# Altium PCB 10P50MIL-Debugger-Adapter-Board.PcbDoc
Units mm, origin at the board's own origin, x right, y up, seen from the top; angles counter-clockwise.
Board outline 36 x 36 mm, 2 copper layers (Top Layer, Bottom Layer), stack 1.621 mm thick; 6 components, 10 nets, 50 pads, 4 vias.
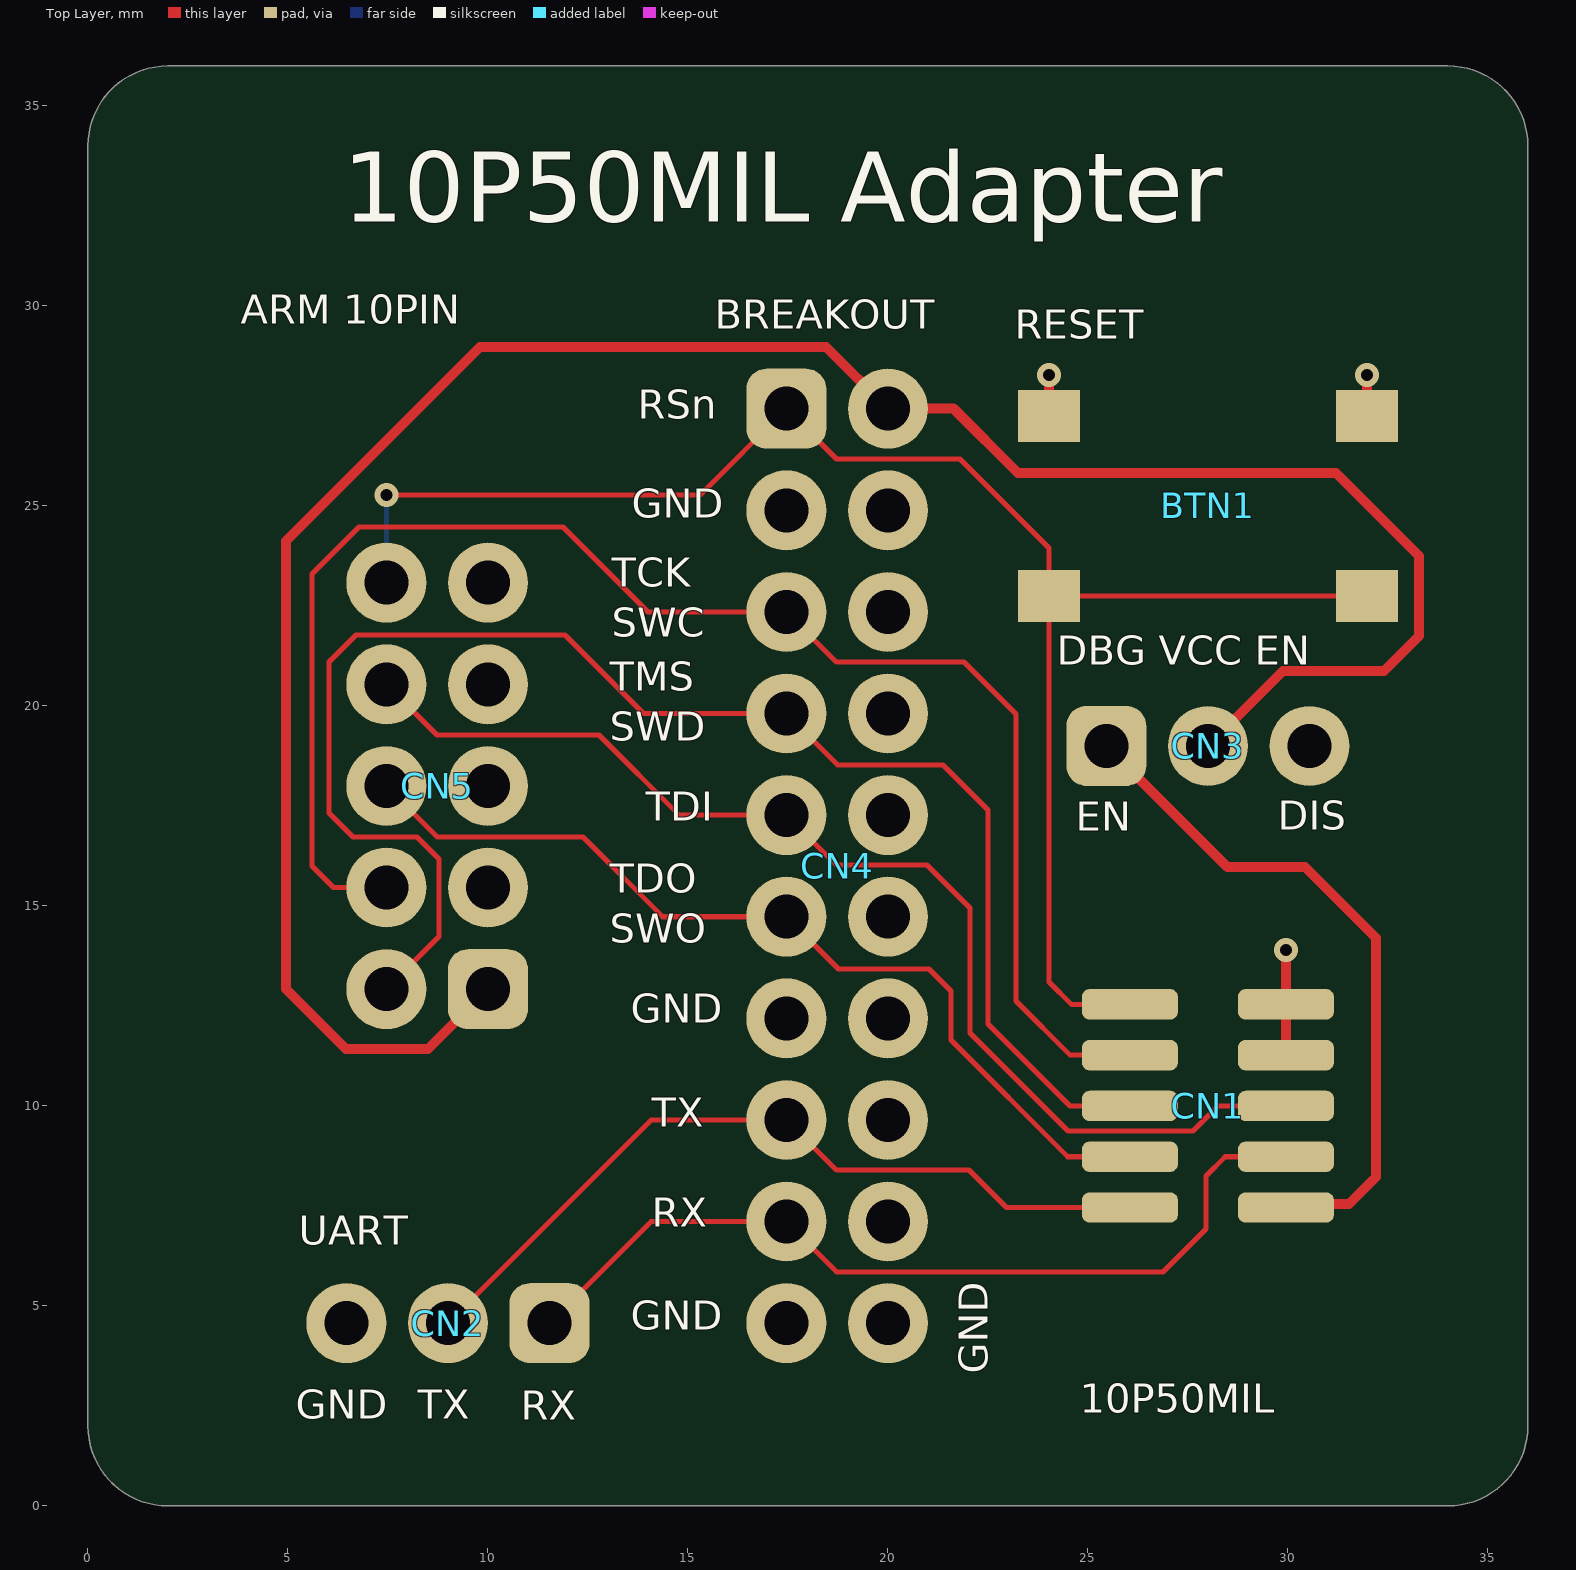
[diagram p0: Top Layer view]
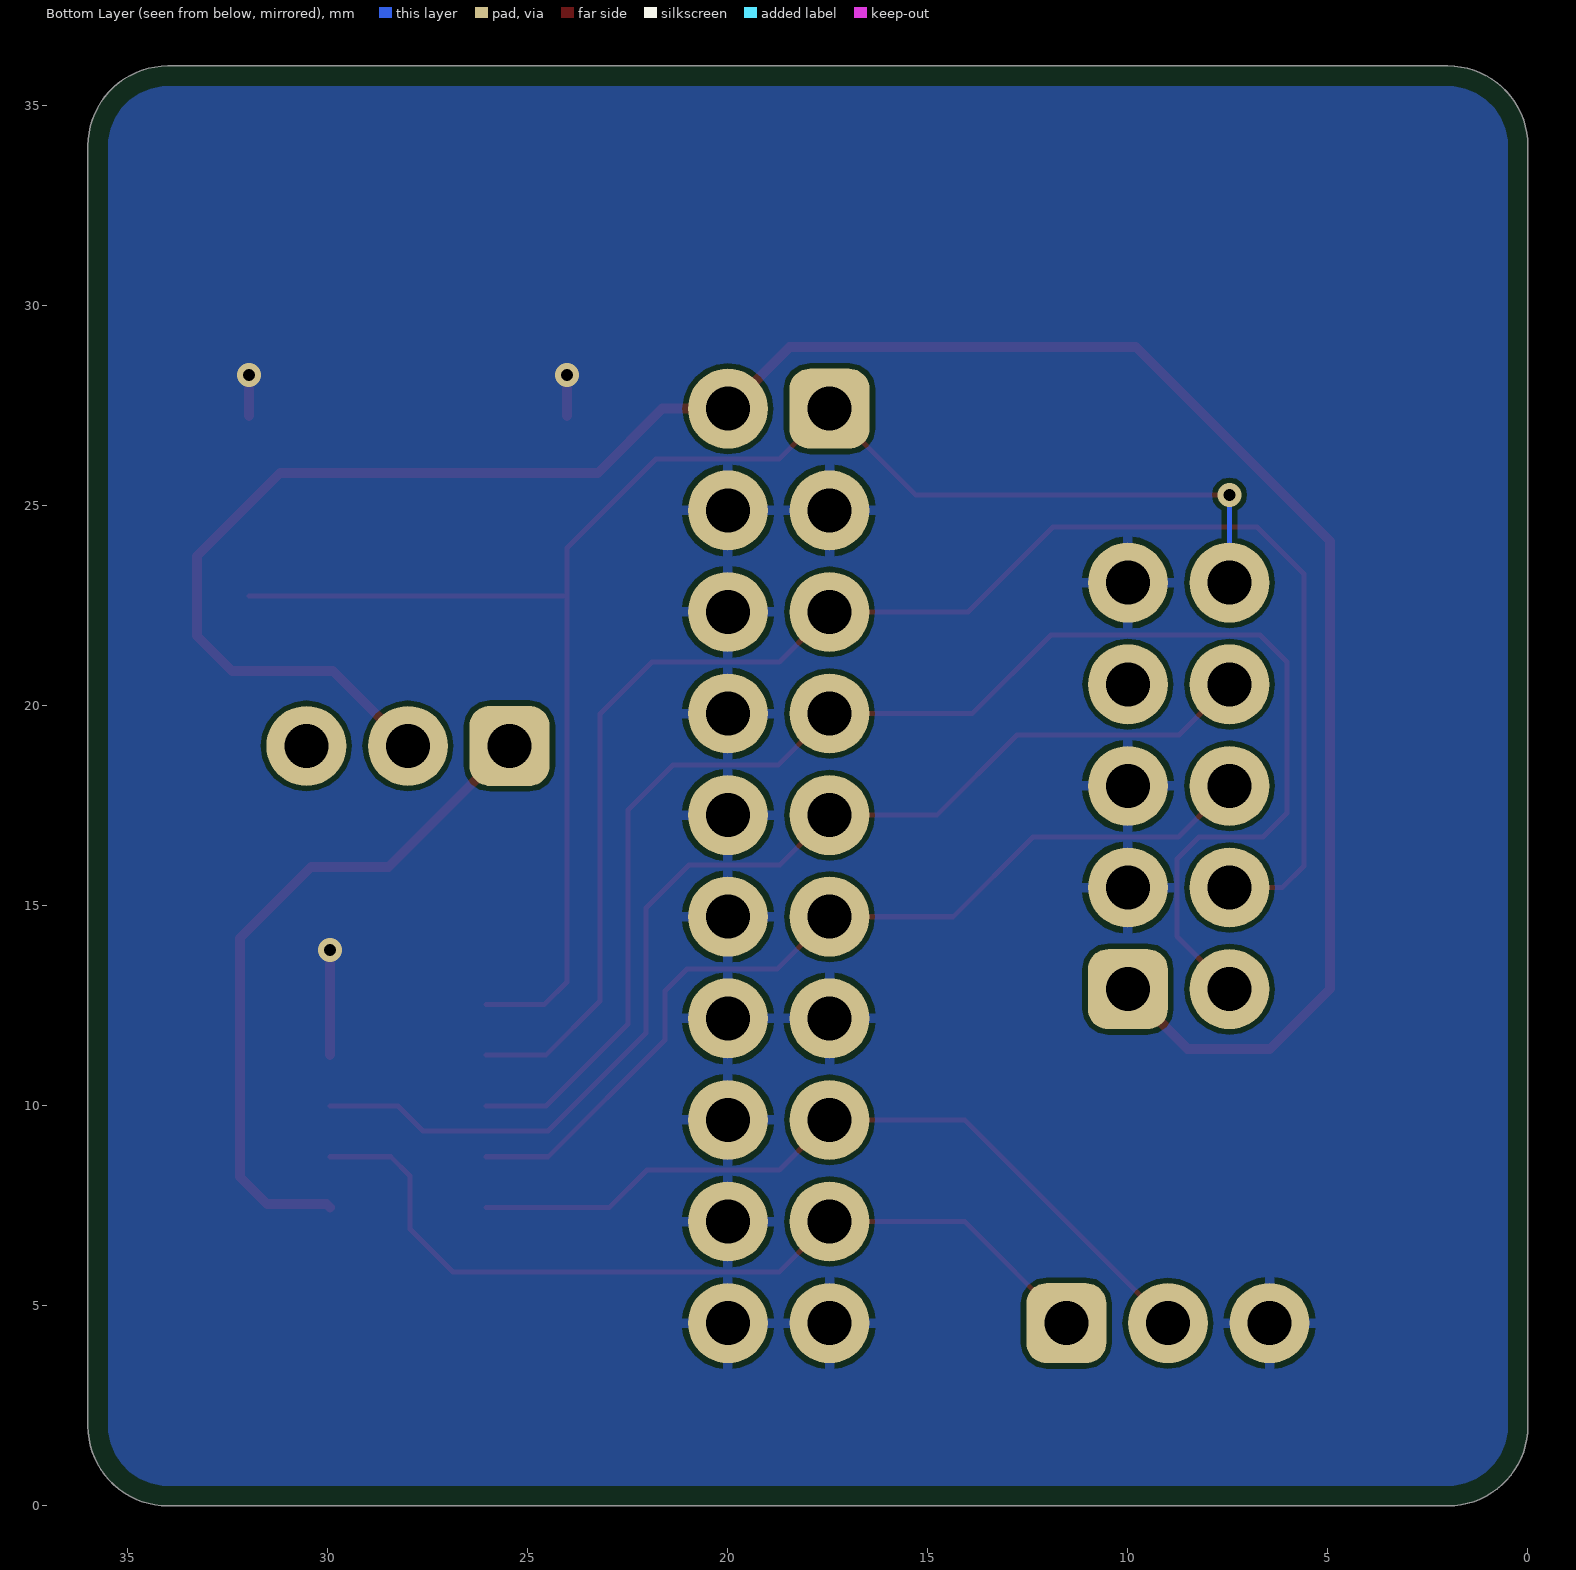
[diagram p1: Bottom Layer view, seen from below]
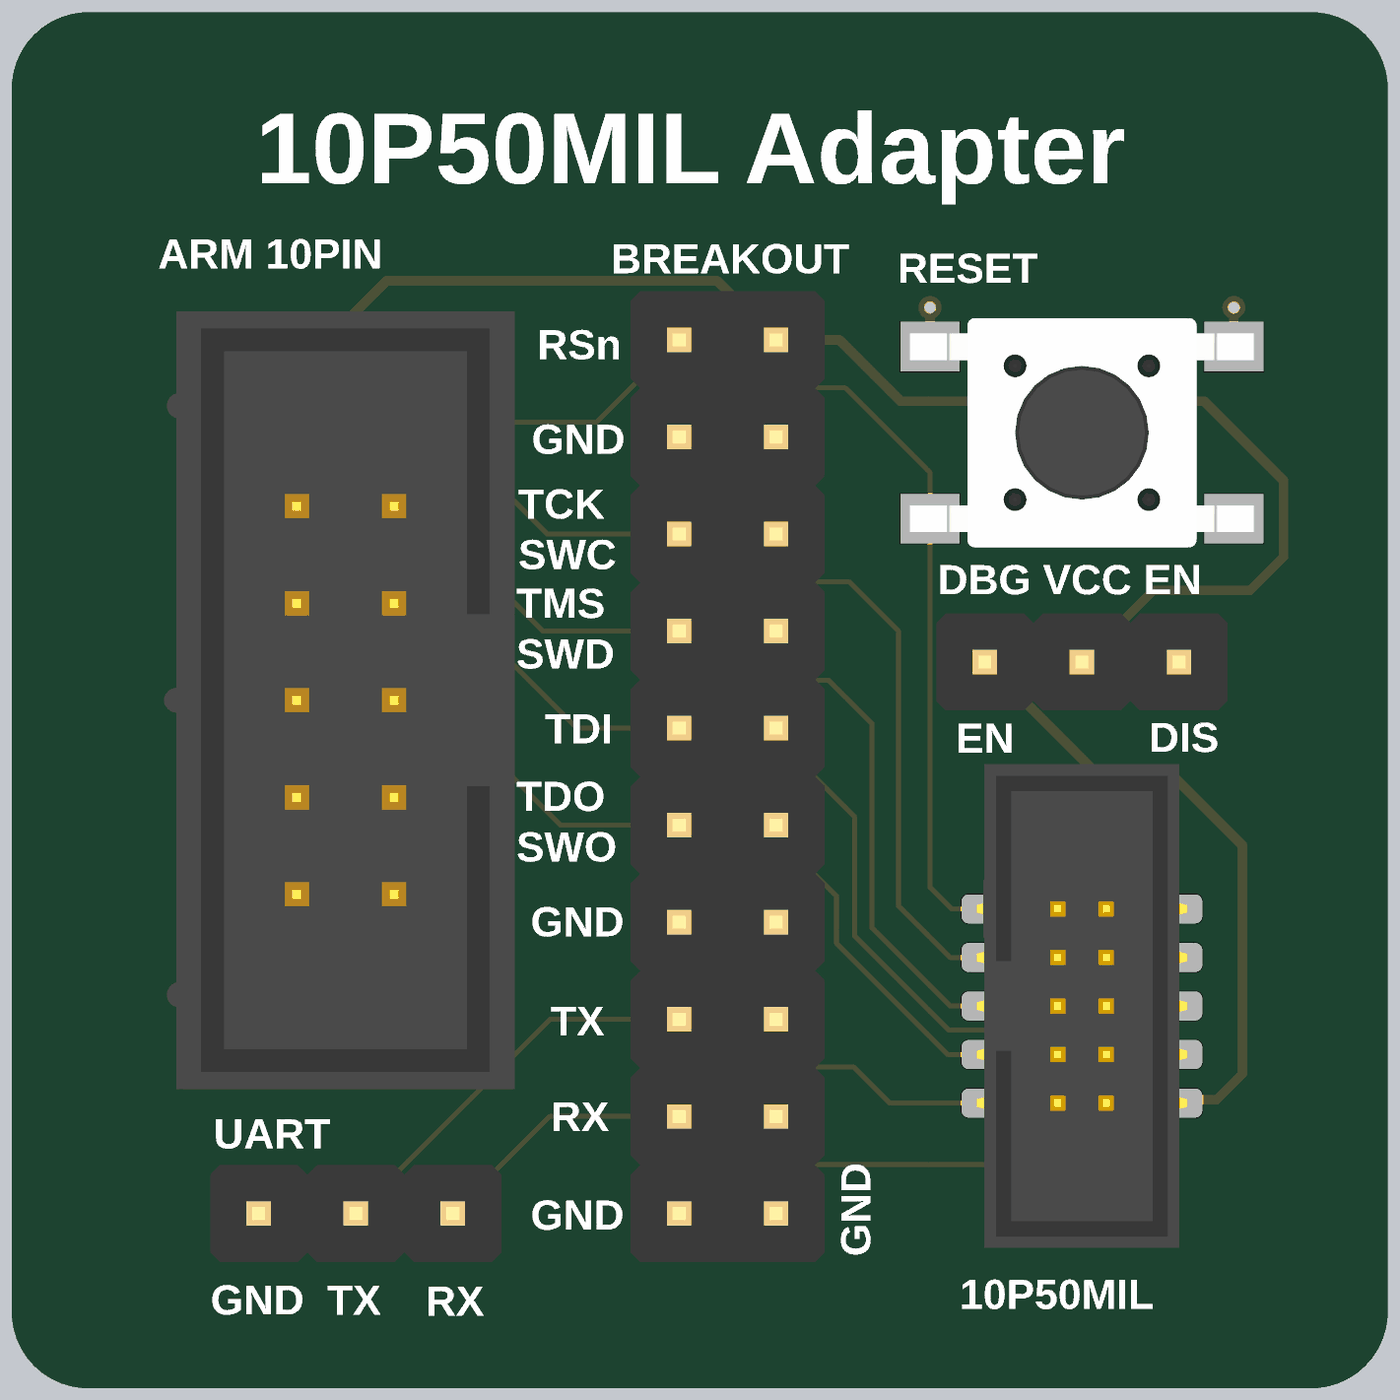
[diagram p2: 3D render of the assembled board from above, using the file's embedded part models]

## Layer stack, top to bottom
Top Solder: solder mask 0.0102, Solder Resist, Dk 3.5
Top Layer: signal copper 0.0356
Dielectric 1: dielectric 1.55, FR-4, Dk 4.8
Bottom Layer: signal copper 0.0356
Bottom Solder: solder mask 0.0102, Solder Resist, Dk 3.5

## Board outline
0,2 0,34 cw(c2,34) 2,36 34,36 cw(c34,34) 36,34 36,2 cw(c34,2) 34,0 2,0 cw(c2,2)

## Design rules (kind name [scope] priority, off if disabled: settings)
BoardOutlineClearance [All] p1: gap=0.2 ignorepadtopadclearanceinfootprint=FALSE except(0.5: Poly-OutlineEdge Poly-CavityEdge Poly-CutoutEdge Poly-SplitBarrior Poly-SplitContinuation)
Clearance [All] p1: gap=0.127 ignorepadtopadclearanceinfootprint=FALSE
ComponentClearance [All] p1: gap=0 collisioncheckmode=3 verticalgap=0 showdistances=FALSE
HoleSize [All] p1: absolutevalues=TRUE maxlimit=6.3 minlimit=0.3 maxpercent=80.000 minpercent=20.000
HoleToHoleClearance [All] p1: gap=0.1 allowstackedmicrovias=TRUE
MinimumSolderMaskSliver [All] p1: minsoldermaskwidth=0.1
PolygonConnect [All] p1: thpad.connectstyle=Relief thpad.reliefconductorwidth=0.25 thpad.reliefentries=4 thpad.polygonreliefangle="90 Angle" thpad.airgapwidth=0.15 smdpad.connectstyle=Relief smdpad.reliefconductorwidth=0.25 smdpad.reliefentries=4 smdpad.polygonreliefangle="90 Angle" smdpad.airgapwidth=0.15 via.connectstyle=Direct via.reliefconductorwidth=0.254 via.reliefentries=4 via.polygonreliefangle="90 Angle" via.airgapwidth=0.254
RoutingVias [All] p1: holewidth=0.3 width=0.6 viastyle="Through Hole" minholewidth=0.3 minwidth=0.6 maxholewidth=6.3 maxwidth=10
SilkToSilkClearance [All] p1: silktosilkclearance=0
SilkToSolderMaskClearance [IsPad] p1: minsilkscreentomaskgap=0 clearancetoexposedcopper=TRUE
SolderMaskExpansion [All] p1: expansion=0.025
Width "Width Power" [InNetClass('Power')] p1: maxlimit=10 minlimit=0.127 preferedwidth=0.25
Width [All] p2: maxlimit=10 minlimit=0.127 preferedwidth=0.127
24 further rules are at their usual default settings.

## Classes and differential pairs
net class Power: GND VCC VCC_DBG

## Components (designator, comment, footprint, x,y, rotation, side; value= is the part's Value field where it differs from the comment)
BTN1 "PTS645SL50SMTR92LFS" BTN-SMD-PTS645-CK 28,25 r180 top
CN1 "3220-10-0300-00" CON-SMD-PINHEADER-SHIELDED-1.27MM-10POS-2X5-3220-10-0300-00-CNC-TECH 28,10 r270 top
CN2 "PRPC003SAAN-RC" CON-THT-PINHEADER-2.54MM-3POS-1X3 11.54,4.57 r180 top
CN3 "PRPC003SAAN-RC" CON-THT-PINHEADER-2.54MM-3POS-1X3 25.46,19 r0 top
CN4 "PRPC010DAAN-RC" CON-THT-PINHEADER-2.54MM-20POS-2X10 17.46,27.43 r270 top
CN5 "61201021621" CON-THT-PINHEADER-SHIELDED-2.54MM-10POS-61201021621-WURTH 10,12.92 r90 top

## Footprints (in the part's own frame and the unit in brackets; to place one, negate y for a bottom-side part, rotate by r counter-clockwise, add the part's x,y. Pads: shape width x height; smd on the part's side, far side on the other; paste and mask are expansions set on the pad)
BTN-SMD-PTS645-CK [mm] "PTS645 SMD Button"
  rect 1.55x1.3 smd: 1(-3.975,2.25) 2(3.975,2.25) 3(-3.975,-2.25) 4(3.975,-2.25)
  body extent -4.5,-3 4.5,3, height 4.3
CON-SMD-PINHEADER-SHIELDED-1.27MM-10POS-2X5-3220-10-0300-00-CNC-TECH [mm] "3220-10-0300-00 2X5 1.27mm Pinheader SMD Connector, CNC Tech"
  rrect50% 0.76x2.4 smd: 1(-2.54,-1.95) 2(-2.54,1.95) 3(-1.27,-1.95) 4(-1.27,1.95) 5(0,-1.95) 6(0,1.95) 7(1.27,-1.95) 8(1.27,1.95) 9(2.54,-1.95) 10(2.54,1.95)
  body extent -6.32,-2.75 6.33,2.75, height 5.6
CON-THT-PINHEADER-2.54MM-3POS-1X3 [mm] "1X3 2.54mm Pinheader THT Connector"
  rrect50% 2x2 hole 1.1 paste-5: 1(0,0)
  round 2 hole 1.1 paste-5: 2(2.54,0) 3(5.08,0)
  body extent -1.27,-1.27 6.35,1.27, height 8.54
CON-THT-PINHEADER-2.54MM-20POS-2X10 [mm] "2X10 2.54mm Pinheader THT Connector"
  rrect50% 2x2 hole 1.1 paste-5: 1(0,0)
  round 2 hole 1.1 paste-5: 2(0,2.54) 3(2.54,0) 4(2.54,2.54) 5(5.08,0) 6(5.08,2.54) 7(7.62,0) 8(7.62,2.54) 9(10.16,0) 10(10.16,2.54) 11(12.7,0) 12(12.7,2.54) 13(15.24,0) 14(15.24,2.54) 15(17.78,0) 16(17.78,2.54) 17(20.32,0) 18(20.32,2.54) 19(22.86,0) 20(22.86,2.54)
  body extent -1.27,-1.27 24.13,3.81, height 8.54
CON-THT-PINHEADER-SHIELDED-2.54MM-10POS-61201021621-WURTH [mm] "61201021621 2.54mm Shielded Pinheader THT Connector, Würth"
  rrect50% 2x2 hole 1.1 paste-5: 1(0,0)
  round 2 hole 1.1 paste-5: 2(0,2.54) 3(2.54,0) 4(2.54,2.54) 5(5.08,0) 6(5.08,2.54) 7(7.62,0) 8(7.62,2.54) 9(10.16,0) 10(10.16,2.54)
  body extent -5.1,-3.15 15.26,6.02, height 9.13

## Part data
BTN1: "BTN TACT SPST-NO 12V 50mA SMD BLACK", Color=Black, Current Rating=50mA, Internal Part Number=BTN000006, Manufacturer="ITT C&K", Max Operating Temperature=60°C, Max Voltage Rating (DC)=12V, Min Operating Temperature=-20°C, Operating Force=1.27N, Package Quantity=1000, Supplier Part Number 1=CKN9088CT-ND, Actuator Material=Nylon,Polyamide, Actuator Type=Standard, ComponentLink1Description=https://datasheet.ciiva.com/26927/getdatasheetpartid-760859-26927133.pdf?src-supplier=Verical, ComponentLink1URL=https://datasheet.ciiva.com/26927/getdatasheetpartid-760859-26927133.pdf?src-supplier=Verical, ComponentLink2Description=https://datasheet.ciiva.com/14920/pts645-14920742.pdf?src-supplier=Digi-Key, ComponentLink2URL=https://datasheet.ciiva.com/14920/pts645-14920742.pdf?src-supplier=Digi-Key, ComponentLink3Description=https://datasheet.ciiva.com/14920/pts645-14920743.pdf?src-supplier=Digi-Key, ComponentLink3URL=https://datasheet.ciiva.com/14920/pts645-14920743.pdf?src-supplier=Digi-Key, ComponentLink4Description=https://datasheet.ciiva.com/14920/pts645-14920744.pdf?src-supplier=Digi-Key, ComponentLink4URL=https://datasheet.ciiva.com/14920/pts645-14920744.pdf?src-supplier=Digi-Key, ComponentLink5Description=https://datasheet.ciiva.com/46429/1839862-46429337.pdf?src-supplier=Element14, ComponentLink5URL=https://datasheet.ciiva.com/46429/1839862-46429337.pdf?src-supplier=Element14, ComponentLink6Description=https://datasheet.ciiva.com/46429/1839862-46429338.pdf?src-supplier=Element14, ComponentLink6URL=https://datasheet.ciiva.com/46429/1839862-46429338.pdf?src-supplier=Element14, Contact Material=Bronze, Contact Plating=Silver, Depth=9mm, Illumination Type=Non-Illuminated, Lead Free="Lead Free", Length=6mm, Manufacturer Part Number=PTS645SL50SMTR92LFS, Max Current Rating=50mA, Mechanical Life=100000Cycles, Mount="Surface Mount", Orientation=Straight, Packaging="Tape and Reel", Pricing 1="1 = 0,31000, 10 = 0,30000, 25 = 0,29000, 50 = 0,27960, 100 = 0,26410, 250 = 0,24860, 500 = 0,23822 (USD)", REACH SVHC="No SVHC", RoHS=Yes, Stock 1=127172, Supplier 1=Digi-Key, Switch Function=Off-Mom, Termination="Gull Wing", Throw Configuration=SPST, Voltage Rating (DC)=12V
CN1: "CON PINHDR SMD 1.27MM SHIELDED KEYED CNC TECH 10POS", Internal Part Number=CON000024, Manufacturer 1="CNC Tech", Package Quantity=3200, Supplier Part Number 1=1175-1629-ND, ComponentLink1Description=https://datasheet.ciiva.com/18655/3220-xx-0300-00-18655365.pdf?src-supplier=Digi-Key, ComponentLink1URL=https://datasheet.ciiva.com/18655/3220-xx-0300-00-18655365.pdf?src-supplier=Digi-Key, Connector Type="Male Pin", Contact Plating=Gold, Manufacturer Part Number 1=3220-10-0300-00, Mount="Surface Mount", Number of Positions=10, Number of Rows=2, Packaging=Tray, Pitch=0.05inch, Pricing 1="1=0,74000, 10=0,69000, 100=0,52900, 500=0,46000, 3200=0,34500, 6400=0,33350, 12800=0,30590 (USD)", RoHS=Yes, Row Spacing=0.05inch, Stock 1=107713, Supplier 1=Digi-Key, Termination=Solder
CN2 CN3: "CON PINHDR 2.54MM 1x03", Color=Black, Internal Part Number=CON000025, Manufacturer=Sullins, Package Quantity=1, Supplier Part Number 1=S1011EC-03-ND, ComponentLink1Description=https://datasheet.ciiva.com/741/xrxczzzsxxn-rc-st-11635-b-741242.pdf?src-supplier=Digi-Key, ComponentLink1URL=https://datasheet.ciiva.com/741/xrxczzzsxxn-rc-st-11635-b-741242.pdf?src-supplier=Digi-Key, Connector Type="Male Pin", Contact Mating Length=0.23inch, Contact Plating=Gold, Manufacturer Part Number=PRPC003SAAN-RC, Mount="Through Hole", Number of Positions=3, Number of Rows=1, Packaging=Bulk, Pitch=0.1inch, Pricing 1="1 = 0,12000, 10 = 0,10900, 25 = 0,08120, 50 = 0,06960, 100 = 0,06730, 250 = 0,05804, 500 = 0,05572 (USD)", RoHS=Yes, Stock 1=16923, Supplier 1=Digi-Key, Termination=Solder
CN4: "CON PINHDR 2.54MM 2x10", Color=Black, Internal Part Number=CON000027, Manufacturer=Sullins, Package Quantity=1, Supplier Part Number 1=S2011EC-10-ND, ComponentLink1Description=https://datasheet.ciiva.com/741/xrxczzzdxxn-rc-11636-b-741275.pdf?src-supplier=Digi-Key, ComponentLink1URL=https://datasheet.ciiva.com/741/xrxczzzdxxn-rc-11636-b-741275.pdf?src-supplier=Digi-Key, Connector Type="Male Pin", Contact Mating Length=0.23inch, Contact Plating=Gold, Manufacturer Part Number=PRPC010DAAN-RC, Mount="Through Hole", Number of Positions=20, Number of Rows=2, Packaging=Bulk, Pitch=0.1inch, Pricing 1="1 = 0,50000, 10 = 0,46400, 25 = 0,41800, 50 = 0,37160, 100 = 0,35600, 250 = 0,32508, 500 = 0,30960 (USD)", RoHS=Yes, Row Spacing=0.1inch, Stock 1=2248, Supplier 1=Digi-Key, Termination=Solder
CN5: "CON PINHDR 2.54MM SHIELDED 2x05 WURTH", Color=Black, Current Rating=3A, Flammability Rating="UL94 V-0", Insulation Resistance=1GR, Internal Part Number=CON000008, Manufacturer="Wurth Electronics", Max Operating Temperature=125°C, Min Operating Temperature=-40°C, Package Quantity=260, Supplier Part Number 1=732-2094-ND, Voltage Rating=250V, ComponentLink1Description=https://datasheet.ciiva.com/731/6120xx21621-731344.pdf?src-supplier=Digi-Key, ComponentLink1URL=https://datasheet.ciiva.com/731/6120xx21621-731344.pdf?src-supplier=Digi-Key, ComponentLink2Description=https://datasheet.ciiva.com/15395/6120xx21621-265834-15395106.pdf?src-supplier=Mouser, ComponentLink2URL=https://datasheet.ciiva.com/15395/6120xx21621-265834-15395106.pdf?src-supplier=Mouser, ComponentLink3Description=https://datasheet.ciiva.com/7648/76595-7648121.pdf?src-supplier=Element14, ComponentLink3URL=https://datasheet.ciiva.com/7648/76595-7648121.pdf?src-supplier=Element14, Connector Type="Male Pin", Contact Gender=Male, Contact Material="Copper Alloy,Copper", Contact Plating=Gold, Gender=Male, Height=8.85mm, Housing Material=PBT, Lead Free="Lead Free", Length=9.1mm, Manufacturer Part Number=61201021621, Mount="Through Hole", Number of Contacts=10, Number of Positions=10, Number of Rows=2, Orientation=Straight, Packaging=Tray, Pitch=2.54mm, Pricing 1="1 = 0,45000, 10 = 0,43700, 50 = 0,40300, 100 = 0,36100, 260 = 0,31900, 520 = 0,31100 (USD)", REACH SVHC=Unknown, RoHS=Yes, Row Spacing=0.1inch, Stock 1=9556, Supplier 1=Digi-Key, Termination=Solder, Width=20.36mm

## Via types
v1: diameter 0.6, hole 0.3, Top Layer to Bottom Layer, tented both sides, 4 vias

## Nets (pads, with @x,y where several pads share a name; then routed paths per layer and width w, separated by ;. In a path a pad name is that pad's centre, name@x,y a point inside that pad or via, vN(x,y) a via of type N, cw(c..) or ccw(c..) an arc to the next point about the centre after c; other vN are vias at no path point)
DBG_JTAG_TCK_SWCLK: CN1.3 CN4.5 CN5.4 | length 40
  Top Layer w0.127: CN5.4 6.14,15.46 5.6,16 5.6,23.3 6.775,24.475 11.875,24.475 14,22.35 CN4.5 18.71,21.1 21.9,21.1 23.2,19.8 23.2,12.625 24.555,11.27 CN1.3
DBG_JTAG_TDI: CN1.6 CN4.9 CN5.8 | length 29.2
  Top Layer w0.127: CN5.8 8.725,19.275 12.775,19.275 14.78,17.27 CN4.9 18.705,16.025 20.975,16.025 22.05,14.95 22.05,11.825 24.5,9.375 27.625,9.375 28.25,10 CN1.6
DBG_JTAG_TDO_TRACE_SWO: CN1.7 CN4.11 CN5.6 | length 23.1
  Top Layer w0.127: CN5.6 8.735,16.725 12.375,16.725 14.37,14.73 CN4.11 18.765,13.425 21.025,13.425 21.575,12.875 21.575,11.65 24.495,8.73 CN1.7
DBG_JTAG_TMS_SWDIO: CN1.5 CN4.7 CN5.2 | length 39.1
  Top Layer w0.127: CN5.2 8.775,14.235 8.775,16.175 8.225,16.725 6.625,16.725 6.025,17.325 6.025,21.1 6.7,21.775 11.925,21.775 13.89,19.81 CN4.7 18.745,18.525 21.375,18.525 22.5,17.4 22.5,12.05 24.55,10 CN1.5
DBG_RESETn: BTN1.1 BTN1.2 CN1.1 CN4.1 CN5.10 | length 42.2
  Top Layer w0.127: v1(7.46,25.275) 15.305,25.275 CN4.1 18.715,26.175 21.8,26.175 24.025,23.95 BTN1.2 ; CN1.1 24.585,12.54 24.025,13.1 BTN1.2 ; BTN1.1 BTN1.2
  Bottom Layer w0.127: CN5.10 v1(7.46,25.275)
DBG_UART_RX: CN1.8 CN2.1 CN4.17 | length 22
  Top Layer w0.127: CN2.1 14.08,7.11 CN4.17 18.72,5.85 26.875,5.85 27.95,6.925 27.95,8.25 28.43,8.73 CN1.8
DBG_UART_TX: CN1.9 CN2.2 CN4.15 | length 20.1
  Top Layer w0.127: CN2.2 14.08,9.65 CN4.15 18.71,8.4 22.025,8.4 22.965,7.46 CN1.9
GND: BTN1.3 BTN1.4 CN1.2 CN1.4 CN2.3 CN4.3 CN4.4 CN4.6 CN4.8 CN4.10 CN4.12 CN4.13 CN4.14 CN4.16 CN4.18 CN4.19 CN4.20 CN5.3 CN5.5 CN5.9 | length 4.7
  Top Layer w0.25: BTN1.4 v1(24.025,28.275) ; CN1.4 CN1.2 v1(29.95,13.9) ; BTN1.3 v1(31.975,28.275)
VCC: CN3.2 CN4.2 CN5.1 | length 58.4
  Top Layer w0.25: CN5.1 8.505,11.425 6.45,11.425 4.95,12.925 4.95,24.125 9.8,28.975 18.455,28.975 CN4.2 21.645,27.43 23.25,25.825 31.2,25.825 33.275,23.75 33.275,21.75 32.4,20.875 29.875,20.875 CN3.2
VCC_DBG: CN1.10 CN3.1 | length 17.3
  Top Layer w0.25: CN3.1 28.485,15.975 30.425,15.975 32.2,14.2 32.2,8.225 31.525,7.55 30.04,7.55 CN1.10
pads on no net: CN3.3 CN5.7

## Polygon pours and split planes (outlines as drawn)
GND on Bottom Layer "GND_L02_P000" (solid, pour order 0): 0,2 0,34 cw(c2,34) 2,36 34,36 cw(c34,34) 36,34 36,2 cw(c34,2) 34,0 2,0 cw(c2,2)

## Silkscreen, mask and mechanical layers (free items; w line width, h text height)
Top Overlay:
  text "10P50MIL Adapter" at 6.375,31.525 h3
  text "ARM 10PIN" at 3.825,29.3 h1.25
  text "BREAKOUT" at 15.675,29.175 h1.25
  text "RESET" at 23.175,28.925 h1.25
  text "RSn" at 13.75,26.925 h1.25
  text "GND" at 13.6,24.45 h1.25
  text "TCK / SWC" at 13.1,21.475 h1.25
  text "DBG VCC EN" at 24.225,20.775 h1.25
  text "TMS / SWD" at 13.05,18.875 h1.25
  text "TDI" at 13.95,16.875 h1.25
  text "DIS" at 29.75,16.65 h1.25
  text "EN" at 24.7,16.625 h1.25
  text "TDO / SWO" at 13.05,13.825 h1.25
  text "GND" at 13.575,11.825 h1.25
  text "TX" at 14.1,9.225 h1.25
  text "RX" at 14.1,6.725 h1.25
  text "UART" at 5.275,6.275 h1.25
  text "GND" at 13.575,4.15 h1.25
  text "GND" at 22.75,3.3 h1.25 r90
  text "10P50MIL" at 24.8,2.075 h1.25
  text "GND" at 5.2,1.93 h1.25
  text "TX" at 8.25,1.925 h1.25
  text "RX" at 10.825,1.9 h1.25
Board:
  the board outline again, w0.2

## Dimensions
36,0 to 36,36 on Mechanical 1
0,0 to 36,0 on Mechanical 1